# Altium PCB ArduinoShield.PcbDoc
Units mm, origin at the board's own origin, x right, y up, seen from the top; angles counter-clockwise.
Board outline 72.11 x 53.34 mm, 2 copper layers (Top Layer, Bottom Layer); 47 components, 47 nets, 124 pads, 0 vias.
Unrouted connection lines stored in the file: 2.
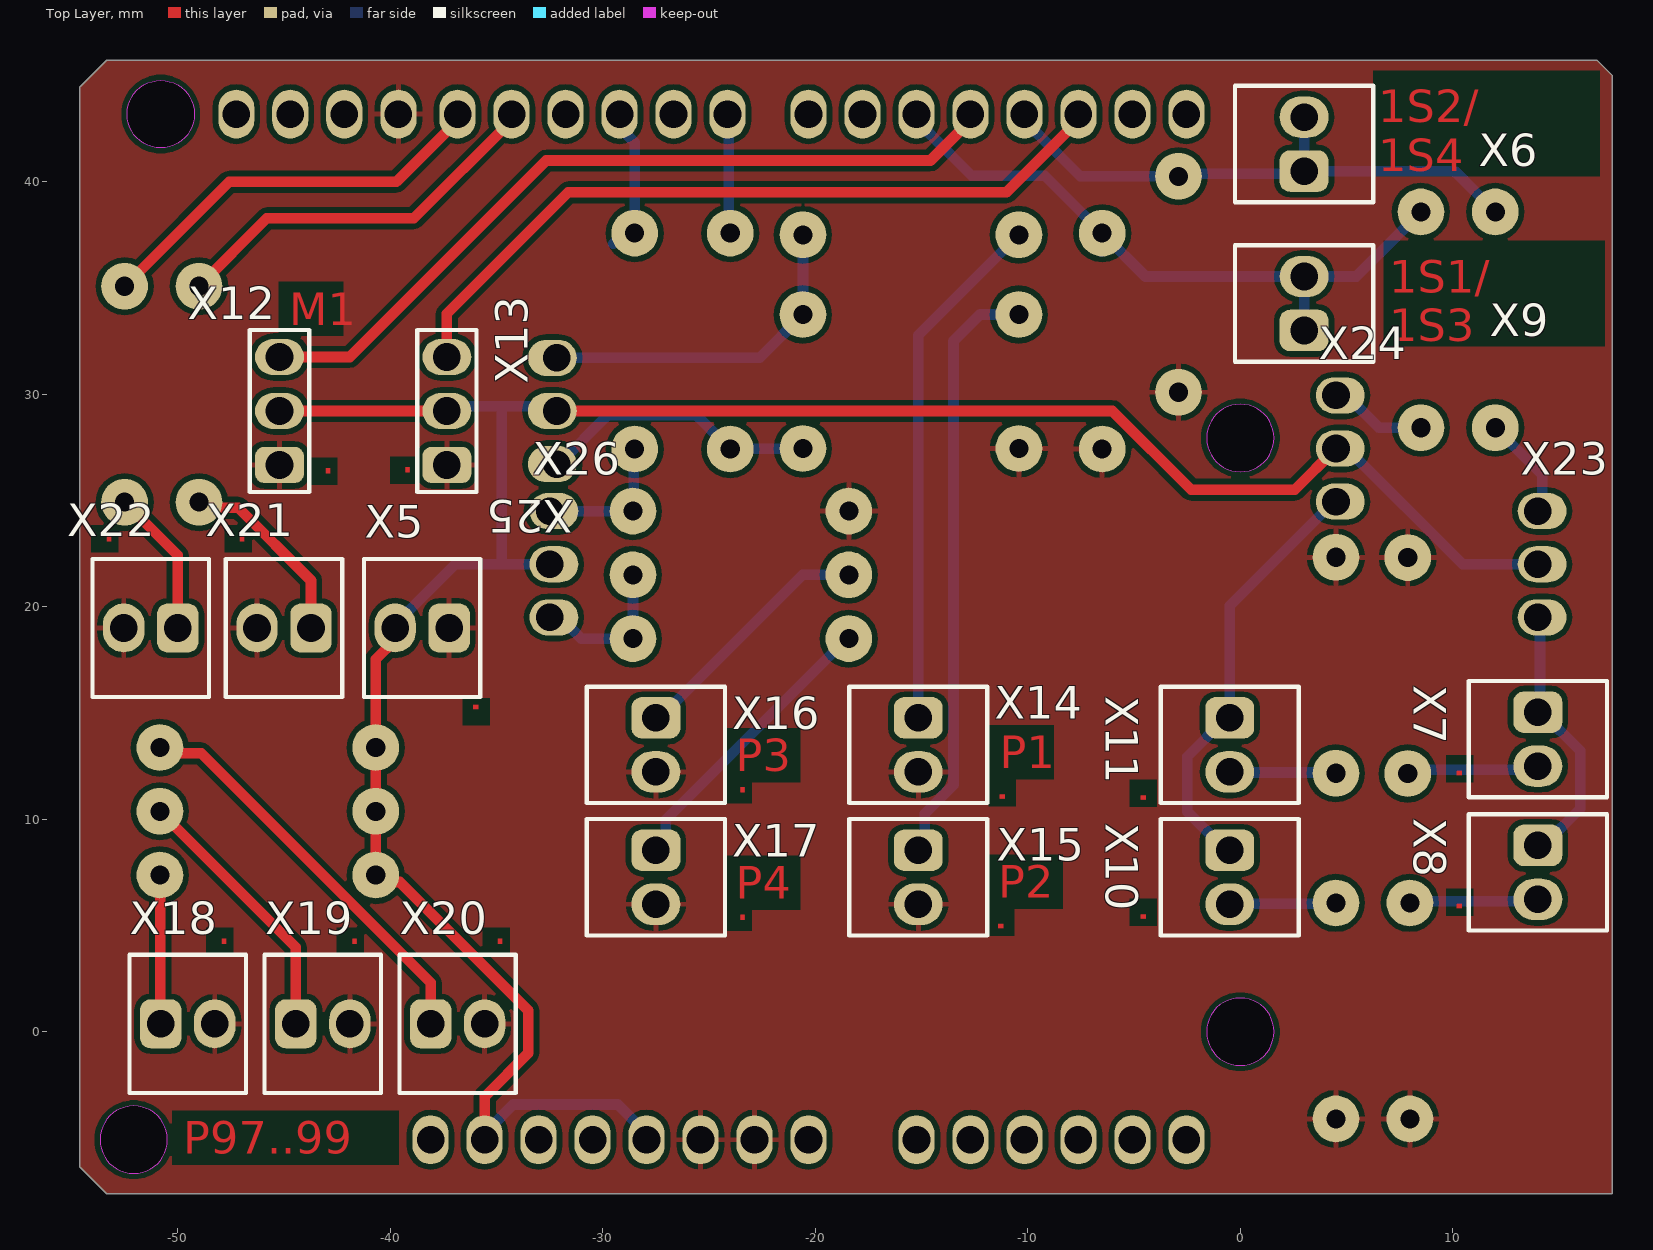
[diagram p0: Top Layer view]
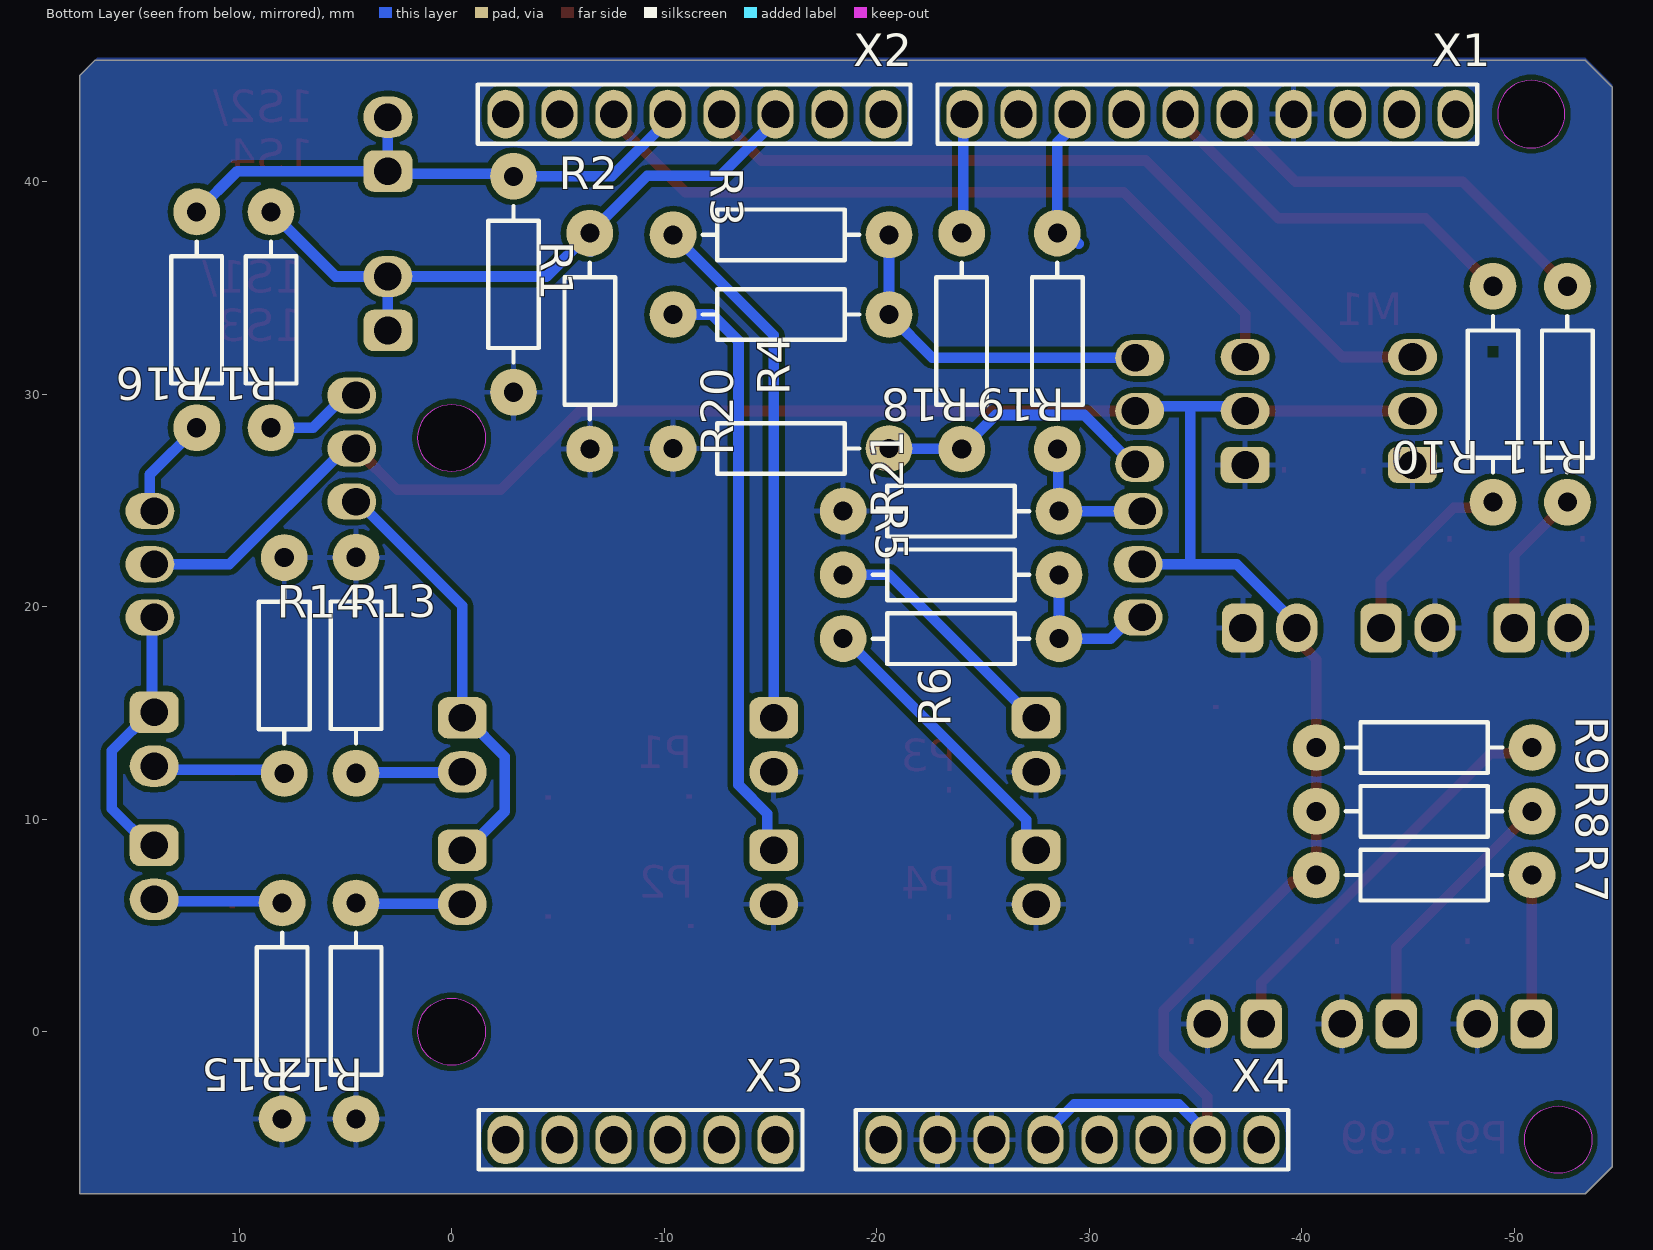
[diagram p1: Bottom Layer view, seen from below]
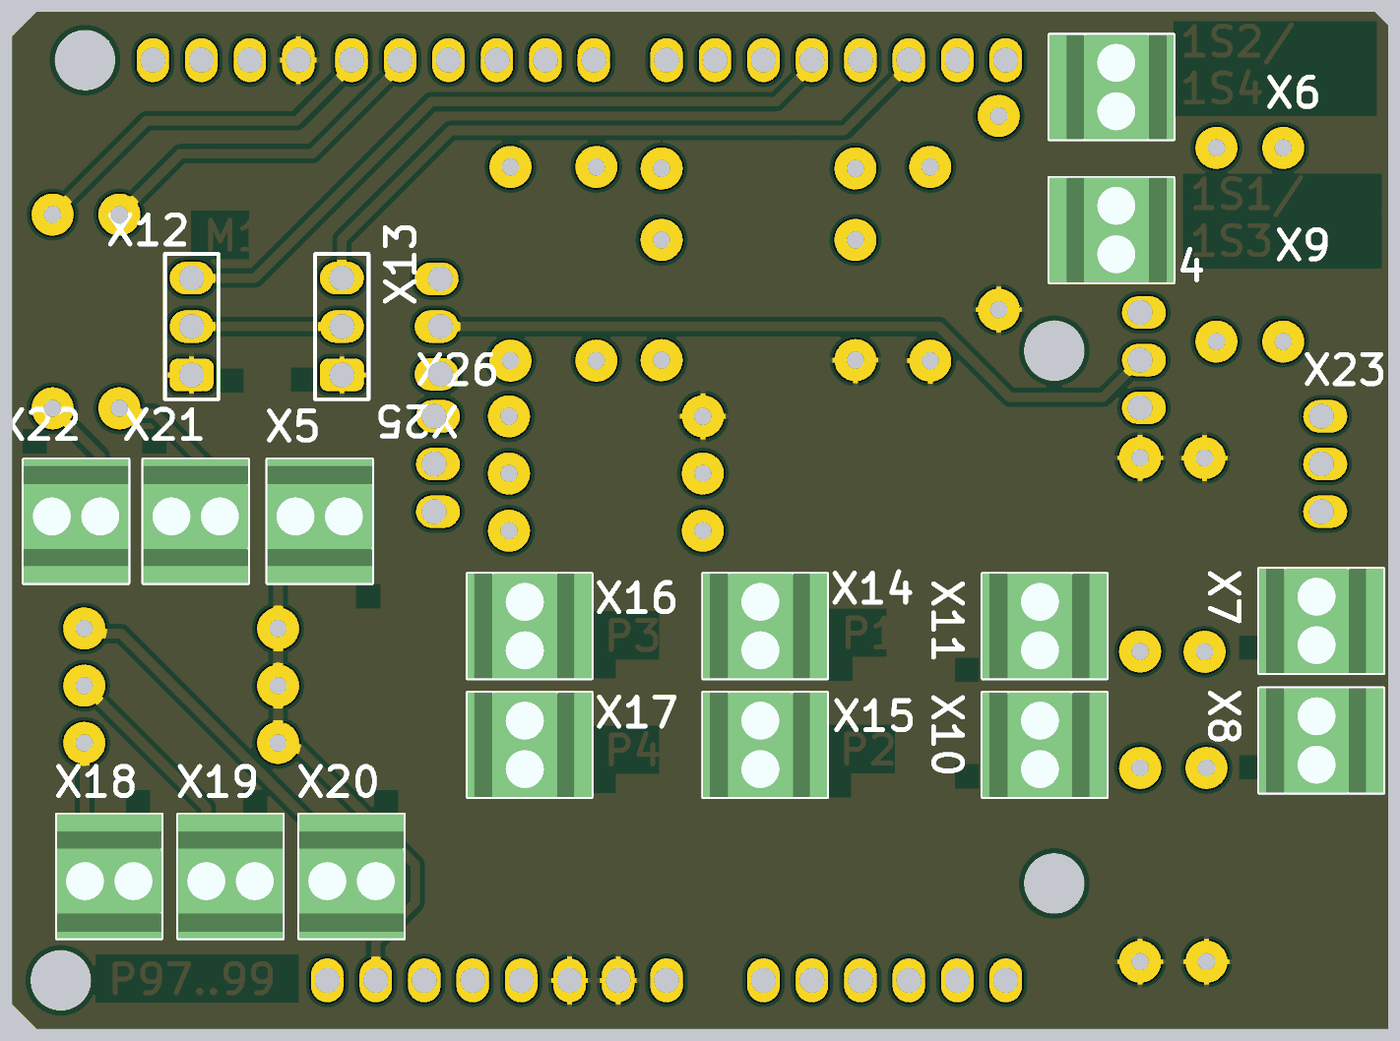
[diagram p2: 3D render of the assembled board from above, using the file's embedded part models]

## Layer stack, top to bottom
Top Solder: solder mask 0.0102, Solder Resist, Dk 3.5
Top Layer: signal copper 0.0356
Dielectric2: dielectric 0.32, FR-4, Dk 4.8
Bottom Layer: signal copper 0.0356
Bottom Solder: solder mask 0.0102, Solder Resist, Dk 3.5

## Board outline
-53.34,-7.62 17.5,-7.62 17.5,-2.5 17.5,29 17.5,45 16.78,45.72 -53.34,45.72 -54.61,44.45 -54.61,19.812 -54.61,-6.35
cut-out: -53.657,-5.08 ccw(c-52.07,-5.08) -52.07,-6.667 ccw(c-52.07,-5.08) -50.482,-5.08 ccw(c-52.07,-5.08) -52.07,-3.492 ccw(c-52.07,-5.08)
cut-out: -50.8,41.593 cw(c-50.8,43.18) -52.387,43.18 cw(c-50.8,43.18) -50.8,44.767 cw(c-50.8,43.18) -49.212,43.18 cw(c-50.8,43.18)
cut-out: -1.587,27.94 ccw(c0,27.94) 0,26.352 ccw(c0,27.94) 1.587,27.94 ccw(c0,27.94) 0,29.527 ccw(c0,27.94)
cut-out: -1.587,0 ccw(c0,0) 0,-1.587 ccw(c0,0) 1.587,0 ccw(c0,0) 0,1.587 ccw(c0,0)

## Design rules (kind name [scope] priority, off if disabled: settings)
Clearance [All] p1: gap=0.254 ignorepadtopadclearanceinfootprint=FALSE except(0: Arc-Hole Track-Hole SMDPad-Hole THPad-Hole Via-Hole Fill-Hole Poly-Hole Region-Hole Text-Hole)
DiffPairsRouting [All] p1: maxlimit=0.254 minlimit=0.254 mostfreqgap=0.254 toplayer_minwidth=0.381 toplayer_maxwidth=0.381 toplayer_prefwidth=0.381 bottomlayer_minwidth=0.381 bottomlayer_maxwidth=0.381 bottomlayer_prefwidth=0.381 substack1={5EA368DA-DBC4-4814-93F0-2F85ABCD8383} toplayer_{5ea368da-dbc4-4814-93f0-2f85abcd8383}_minwidth=0.381 toplayer_{5ea368da-dbc4-4814-93f0-2f85abcd8383}_maxwidth=0.381 toplayer_{5ea368da-dbc4-4814-93f0-2f85abcd8383}_prefwidth=0.381 bottomlayer_{5ea368da-dbc4-4814-93f0-2f85abcd8383}_minwidth=0.381 bottomlayer_{5ea368da-dbc4-4814-93f0-2f85abcd8383}_maxwidth=0.381 bottomlayer_{5ea368da-dbc4-4814-93f0-2f85abcd8383}_prefwidth=0.381 maxuncoupledlength=12.7
PolygonConnect [All] p1: connectstyle=Relief reliefconductorwidth=0.254 reliefentries=4 polygonreliefangle="90 Angle" airgapwidth=0.254
RoutingVias [All] p1: holewidth=0.711 width=1.27 viastyle="Through Hole" minholewidth=0.711 minwidth=1.27 maxholewidth=0.711 maxwidth=1.27
SolderMaskExpansion [All] p1: expansion=0.102 istentingtop=FALSE
Width [All] p1: maxlimit=0.7 minlimit=0.254 preferedwidth=0.5 substack1={5EA368DA-DBC4-4814-93F0-2F85ABCD8383} toplayer_{5ea368da-dbc4-4814-93f0-2f85abcd8383}_maxwidth=0.254 toplayer_{5ea368da-dbc4-4814-93f0-2f85abcd8383}_prefwidth=0.254 bottomlayer_{5ea368da-dbc4-4814-93f0-2f85abcd8383}_maxwidth=0.254 bottomlayer_{5ea368da-dbc4-4814-93f0-2f85abcd8383}_prefwidth=0.254 minimp=50.000000 maximp=50.000000 favimp=50.000000
29 further rules are at their usual default settings.

## Components (designator, comment, footprint, x,y, rotation, side; value= is the part's Value field where it differs from the comment)
R1 "10k" AXIAL-1/2W -2.909,35.172 r270 bottom
R2 "10k" AXIAL-1/2W -6.5,32.5 r270 bottom
R3 "100?" AXIAL-1/2W -15.5,37.5 r0 bottom
R4 "100?" AXIAL-1/2W -15.5,33.75 r0 bottom
R5 "100?" AXIAL-1/2W -23.5,21.5 r0 bottom
R6 "100?" AXIAL-1/2W -23.5,18.5 r0 bottom
R7 "100?" AXIAL-1/2W -45.76,7.373 r180 bottom
R8 "100?" AXIAL-1/2W -45.76,10.373 r180 bottom
R9 "100?" AXIAL-1/2W -45.76,13.373 r180 bottom
R10 "100?" AXIAL-1/2W -49,30 r270 bottom
R11 "100?" AXIAL-1/2W -52.5,30 r270 bottom
R12 "220R" AXIAL-1/2W 4.5,0.98 r270 bottom
R13 "220R" AXIAL-1/2W 4.5,17.245 r90 bottom
R14 "220R" AXIAL-1/2W 7.879,17.232 r90 bottom
R15 "220R" AXIAL-1/2W 7.979,0.98 r270 bottom
R16 "150R" AXIAL-1/2W 12,33.5 r270 bottom
R17 "150R" AXIAL-1/2W 8.5,33.5 r270 bottom
R18 "150R" AXIAL-1/2W -24,32.5 r270 bottom
R19 "150R" AXIAL-1/2W -28.5,32.5 r270 bottom
R20 "10k" AXIAL-1/2W -15.5,27.445 r0 bottom
R21 "10k" AXIAL-1/2W -23.5,24.5 r0 bottom
X1 "Header10x1_M" HDR10X1_M -35.56,43.18 r180 bottom locked
X2 "Header8x1_M" HDR8X1_M -11.43,43.18 r0 bottom locked
X3 "Header6x1_M" HDR6X1_M -8.89,-5.08 r0 bottom locked
X4 "Header8x1_M" HDR8X1_M -29.21,-5.08 r0 bottom locked
X5 "SCREW_2X1" 691210910002 -38.5,19 r180 top
X6 "SCREW_2X1" 691210910002 3,41.77 r90 top
X7 "SCREW_2X1" 691210910002 14,13.77 r270 top
X8 "SCREW_2X1" 691210910002 14,7.5 r270 top
X9 "SCREW_2X1" 691210910002 3,34.27 r90 top
X10 "SCREW_2X1" 691210910002 -0.5,7.27 r270 top
X11 "SCREW_2X1" 691210910002 -0.5,13.5 r270 top
X12 "Header3x1_M" HDR3X1_M -45.212,29.21 r90 top
X13 "Header3x1_M" HDR3X1_M -37.338,29.21 r90 top
X14 "SCREW_2X1" 691210910002 -15.153,13.5 r270 top
X15 "SCREW_2X1" 691210910002 -15.153,7.27 r270 top
X16 "SCREW_2X1" 691210910002 -27.5,13.5 r270 top
X17 "SCREW_2X1" 691210910002 -27.5,7.27 r270 top
X18 "SCREW_2X1" 691210910002 -49.53,0.373 r0 top
X19 "SCREW_2X1" 691210910002 -43.172,0.373 r0 top
X20 "SCREW_2X1" 691210910002 -36.83,0.373 r0 top
X21 "SCREW_2X1" 691210910002 -45,19 r180 top
X22 "SCREW_2X1" 691210910002 -51.27,19 r180 top
X23 "TO220" to220 14,22 r90 top
X24 "TO220" to220 4.5,27.445 r90 top
X25 "TO220" to220 -32.174,29.21 r270 top
X26 "TO220" to220 -32.5,22 r90 top

## Footprints (in the part's own frame and the unit in brackets; to place one, negate y for a bottom-side part, rotate by r counter-clockwise, add the part's x,y. Pads: shape width x height; smd on the part's side, far side on the other; paste and mask are expansions set on the pad)
691210910002 [mm] "2,54mm - modular - green - Horizontal wire entry - Cage clamp - 0,8mm2 wires - 02p"
  rrect50% 1.95x2.3 hole 1.3: 1(-1.27,0)
  oval 1.95x2.3 hole 1.3: 2(1.27,0)
  silkscreen extent -2.74,-3.25 2.74,3.25, body extent -2.74,-3.25 2.74,3.25, height 8.55
AXIAL-1/2W [mm] "THD, 2-Leads, Dia 2.4mm, Body Length 6mm"
  round 2.2 hole 0.9: 1(-5.08,0) 2(5.08,0)
  silkscreen extent -3.68,-1.19 3.68,1.19, body extent -5.44,-1.2 5.44,1.19, height 2.39
HDR3X1_M [mm] "Connector; Header; 3x1 Position; Straight"
  rrect50% 1.7x2.3 hole 1.3: 1(-2.54,0)
  oval 1.7x2.3 hole 1.3: 2(0,0) 3(2.54,0)
  silkscreen extent -3.81,-1.4 3.81,1.4, body extent -3.81,-1.27 3.81,1.27, height 9.27
HDR6X1_M [mm] "Connector; Header; 6x1 Position; Straight"
  oval 1.7x2.3 hole 1.3: 1(-6.35,0) 2(-3.81,0) 3(-1.27,0) 4(1.27,0) 5(3.81,0) 6(6.35,0)
  silkscreen extent -7.62,-1.4 7.62,1.4, body extent -7.61,-1.27 7.63,1.27, height 9.27
HDR8X1_M [mm] "Connector; Header; 8x1 Position; Straight"
  oval 1.7x2.3 hole 1.3: 1(-8.89,0) 2(-6.35,0) 3(-3.81,0) 4(-1.27,0) 5(1.27,0) 6(3.81,0) 7(6.35,0) 8(8.89,0)
  silkscreen extent -10.16,-1.4 10.2,1.4, body extent -10.16,-1.27 10.16,1.27, height 9.27
HDR10X1_M [mm] "Connector; Header; 10x1 Position; Straight"
  oval 1.7x2.3 hole 1.3: 1(-11.43,0) 2(-8.89,0) 3(-6.35,0) 4(-3.81,0) 5(-1.27,0) 6(1.27,0) 7(4.06,0) 8(6.604,0) 9(9.144,0) 10(11.684,0)
  silkscreen extent -12.7,-1.4 12.7,1.4, body extent -12.7,-1.27 12.7,1.27, height 9.27
to220 [mm]
  oval 1.7x2.3 hole 1.3 copper offset 0,-0.2: 1(2.5,0) 2(0,0) 3(-2.5,0)

## Part data
R1 R2 R3 R4 R5 R6 R7 R8 R9 R10 R11 R12 R13 R14 R15 R16 R17 R18 R19 R20 R21: library part RES, "Resistor", Supplier 1=CPNV
X1: library part CMP-031-000016-3, "WURTH ELEKTRONIK - 61301011121 - Pin Header, Board-to-Board, 2.54 mm, 1 Rows, 10 Contacts, Through Hole, WR-PHD Series", Color=Black, Current Rating=3A, Flammability Rating="UL94 V-0", Insulation Resistance=1GR, Manufacturer="Wurth Electronics", Manufacturer Part Number=61301011121, Max Operating Temperature=125°C, Min Operating Temperature=-40°C, Package Quantity=1000, Voltage Rating=250V, Category="Headers and Wire Housings", ComponentLink1Description=https://datasheet.ciiva.com/738/6130xx11121-738550.pdf?src-supplier=Digi-Key, ComponentLink1URL=https://datasheet.ciiva.com/738/6130xx11121-738550.pdf?src-supplier=Digi-Key, ComponentLink2Description=https://datasheet.ciiva.com/7631/1442175-7631321.pdf?src-supplier=Element14, ComponentLink2URL=https://datasheet.ciiva.com/7631/1442175-7631321.pdf?src-supplier=Element14, ComponentLink3Description=https://datasheet.ciiva.com/48700/001088187-da-01-en-wr-phd-tht-stiftleiste-61301011121-48700876.pdf?src-supplier=Conrad, ComponentLink3URL=https://datasheet.ciiva.com/48700/001088187-da-01-en-wr-phd-tht-stiftleiste-61301011121-48700876.pdf?src-supplier=Conrad, Connector Type="Male Pin", Contact Gender=Male, Contact Material="Copper Alloy,Copper", Contact Mating Length=0.236inch, Contact Plating=Gold, Contact Type="Male Pin", Design Item ID=Header10x1_M, Gender=Male, Height=11.54mm, Housing Material=PBT, Length=2.54mm, Mount="Through Hole", Number of Contacts=10, Number of Positions=10, Number of Rows=1, Orientation=Straight, Packaging=Bulk, Pitch=2.54mm, Pricing 1="1=0.89000, 10=0.87400, 50=0.73900, 100=0.67200, 1000=0.42700, 10000=0.42700 (USD)", Pricing 2="1=0.89000, 10=0.87400, 50=0.80600, 100=0.73900, 200=0.67200 (USD)", REACH SVHC=Unknown, RoHS=Yes, RoHS Compliant=Yes, Series=WR-PHD, Source=MEION_Connectors.SchLib, Stock 1=1900, Stock 2=4313, Termination=Solder, Width=25.4mm
X2 X4: library part CMP-031-000015-3, "Board-To-Board Connector, Vertical, Wr-Phd Series, Through Hole, Header, 8, 2.54 Mm", Color=Black, Manufacturer="Wurth Electronics", Manufacturer Part Number=61300811121, Category=Connectors, ComponentLink1Description=http://www.farnell.com/cad/1737268.pdf?src-supplier=Element14, ComponentLink1URL=http://www.farnell.com/cad/1737268.pdf?src-supplier=Element14, ComponentLink2Description=https://katalog.we-online.de/em/datasheet/6130xx11121.pdf?src-supplier=Digi-Key, ComponentLink2URL=https://katalog.we-online.de/em/datasheet/6130xx11121.pdf?src-supplier=Digi-Key, Connector Type="Male Pin", Contact Material=Copper, Contact Mating Length=0.236inch, Contact Plating=Gold, Design Item ID=Header8x1_M, Gender=Male, Mount="Through Hole", Number of Contacts=8, Number of Positions=8, Number of Rows=1, Packaging=Bulk, Pitch=0.1inch, Pricing 1="1=0.37000, 10=0.31500, 50=0.21900, 100=0.19900, 1000=0.18100, 10000=0.18100 (USD)", Pricing 2="1=0.37000, 10=0.31500, 25=0.26320, 50=0.21900, 100=0.19900, 1000=0.18100 (USD)", REACH SVHC=Unknown, RoHS=Yes, RoHS Compliant=Yes, Source=MEION_Connectors.SchLib, Stock 1=4202, Stock 2=10891, Termination=Solder
X3: library part CMP-031-000013-3, "WURTH ELEKTRONIK - 61300611121 - Pin Header, Board-to-Board, 2.54 mm, 1 Rows, 6 Contacts, Through Hole, WR-PHD Series", Color=Black, Current Rating=3A, Manufacturer="Wurth Electronics", Manufacturer Part Number=61300611121, Max Operating Temperature=125°C, Min Operating Temperature=-40°C, Voltage Rating=250V, Category="Headers and Wire Housings", ComponentLink1Description=http://www.mouser.com/ds/2/445/6130xx11121-538006.pdf?src-supplier=Mouser, ComponentLink1URL=http://www.mouser.com/ds/2/445/6130xx11121-538006.pdf?src-supplier=Mouser, ComponentLink2Description=https://katalog.we-online.de/em/datasheet/6130xx11121.pdf?src-supplier=Digi-Key, ComponentLink2URL=https://katalog.we-online.de/em/datasheet/6130xx11121.pdf?src-supplier=Digi-Key, ComponentLink3Description=http://www.farnell.com/cad/1737268.pdf?src-supplier=Element14, ComponentLink3URL=http://www.farnell.com/cad/1737268.pdf?src-supplier=Element14, Connector Type="Male Pin", Contact Gender=Male, Contact Material="Copper Alloy,Copper", Contact Mating Length=0.236inch, Contact Plating=Gold, Design Item ID=Header6x1_M, Gender=Male, Housing Material=PBT, Lead Free="Lead Free", Mount="Through Hole", Number of Contacts=6, Number of Positions=6, Number of Rows=1, Packaging=Bulk, Pitch=0.1inch, Pricing 1="1=0.33000, 10=0.27900, 50=0.19400, 100=0.17600, 1000=0.16000, 10000=0.16000 (USD)", Pricing 2="1=0.33000, 10=0.27900, 25=0.23200, 50=0.19400, 100=0.17600, 1000=0.16000 (USD)", REACH SVHC=Unknown, RoHS=Yes, Source=MEION_Connectors.SchLib, Stock 1=7278, Stock 2=46170, Termination="Through Hole"
X5 X6 X7 X8 X9 X10 X11 X14 X15 X16 X17 X18 X19 X20 X21 X22: library part CMP-119-000000-3, "WR-TBL Serie 2109 Horizontal Entry, Rising Cage Clamp, THT, pitch 2.54mm, 2p", Operating Temperature="-40 to +105degC", Rated Current [UL]=6A, Working Voltage [UL]=150VAC, Application="Rising Cage Clamp", Component Type=Standard, ComponentLink1Description=Manufacturer, ComponentLink1URL=http://www.we-online.de, ComponentLink2Description=Datasheet, ComponentLink2URL=https://katalog.we-online.de/em/datasheet/691210910002.pdf, Design Item ID=691210910002, Modularity=No, Mounting Technology=THT, Packaging=Box, PCB/Cable/Panel=PCB, Pin Count=2, Pin Number=2, Pitch=2.54mm, Published Date="Feburary 2021", Source="WR-TBL_Rising Cage Clamp.SchLib", Type=Horizontal
X12 X13: library part CMP-031-000005-4, "WR-PHD 2.54 mm THT Pin Header", Color=Black, Manufacturer="Wurth Electronics", Manufacturer Part Number=61300311121, Category=Connectors, ComponentLink1Description=http://www.farnell.com/cad/1737268.pdf?src-supplier=Element14, ComponentLink1URL=http://www.farnell.com/cad/1737268.pdf?src-supplier=Element14, ComponentLink2Description=https://katalog.we-online.de/em/datasheet/6130xx11121.pdf?src-supplier=Digi-Key, ComponentLink2URL=https://katalog.we-online.de/em/datasheet/6130xx11121.pdf?src-supplier=Digi-Key, Connector Type="Male Pin", Contact Material=Copper, Contact Mating Length=0.236inch, Contact Plating=Gold, Design Item ID=Header3x1_M, Gender=Male, LatestRevisionDate=17-Jul-2002, LatestRevisionNote="Re-released for DXP Platform.", Lead Free="Lead Free", Mount="Through Hole", Number of Contacts=3, Number of Positions=3, Number of Rows=1, Packaging=Bulk, Pitch=0.1inch, Price=0, Publisher="Altium Limited", REACH SVHC=Unknown, RoHS=Yes, Source=MEION_Connectors.SchLib, Stock 1=52616, Termination=Solder

## Nets (pads, with @x,y where several pads share a name; then routed paths per layer and width w, separated by ;. In a path a pad name is that pad's centre, name@x,y a point inside that pad or via, vN(x,y) a via of type N, cw(c..) or ccw(c..) an arc to the next point about the centre after c; other vN are vias at no path point)
+3V3: X4.4
+5V: R7.1 R8.1 R9.1 X4.2 X4.5 X5.2 X12.2 X13.2 X23.2 X24.2 X25.2 X26.2 | length 118.1
  Top Layer w0.5: X12.2 X13.2 ; X5.2 -39.77,18.433 -40.68,17.522 R9.1 R8.1 R7.1 -40.355,7.048 -39.548,7.048 -33.5,1 -33.5,-1 -35.56,-3.06 X4.2 ; X25.2 -6.022,29.21 -2.312,25.5 2.555,25.5 X24.2
  Bottom Layer w0.5: X5.2 -39.77,19.175 -36.945,22 -34.722,22 ; X13.2 -37.123,29.425 -34.756,29.425 ; X4.2 -35.56,-4.78 -34.206,-3.426 -29.294,-3.426 -27.94,-4.78 X4.5 ; X26.2 -34.722,22 ; X25.2 -32.389,29.425 -34.756,29.425 ; X24.2 5.014,27.445 10.459,22 X23.2 ; -34.756,29.425 -34.756,22.034 -34.722,22
AD0: X3.1
AD1: X3.2
AD2: X3.3
AD3: X3.4
AD4/SDA: X1.9 X3.5
AD5/SCL: X1.10 X3.6
AREF: X1.8
GND: R1.2 R2.2 R12.2 R13.2 R14.2 R15.2 R20.2 R21.2 X1.7 X4.6 X4.7 X5.1 X12.1 X13.1 X14.2 X15.2 X16.2 X17.2 X18.2 X19.2 X20.2 X21.2 X22.2
IO2: R2.1 R17.1 X2.3 X9.1 X9.2 | length 31.2
  Bottom Layer w0.5: X2.3 -15.24,42.88 -12.638,40.278 -9.198,40.278 R2.1 -4.46,35.54 X9.2 ; R2.1@-6.546,36.714 R2.1@-6.299,36.961 ; X9.1 X9.2 ; R17.1 5.46,35.54 X9.2
IO3: X2.4 X12.3 | length 37.4
  Top Layer w0.5: X12.3 -41.91,31.75 -32.66,41 -14.58,41 -12.7,42.88 X2.4
IO4: R1.1 R16.1 X2.5 X6.1 X6.2 | length 27
  Bottom Layer w0.5: X2.5 -10.16,42.88 -7.532,40.252 R1.1 -2.785,40.376 2.876,40.376 X6.1 ; X6.2 X6.1 ; R16.1 10.08,40.5 X6.1
IO5: X2.6 X13.3 | length 35.8
  Top Layer w0.5: X13.3 -37.338,33.782 -31.62,39.5 -11,39.5 -7.62,42.88 X2.6
IO6: X2.7
IO7: X2.8
IO8: R18.1 X1.1 | length 5.8
  Bottom Layer w0.5: R18.1@-24.203,36.791 R18.1@-24.167,36.828 ; X1.1@-24.167,43.143 X1.1 -24.065,43.115 -24.065,37.645 R18.1
IO9: X1.2
MISO/IO12: R10.1 X1.5 | length 18.5
  Top Layer w0.5: R10.1 -45.806,38.274 -38.896,38.274 -34.29,42.88 X1.5
  Bottom Layer w0.5: X1.5@-34.29,42.88 X1.5
MOSI/IO11: X1.4
NetR3_1: R3.1 R4.1 X25.3 | length 16.2
  Bottom Layer w0.5: X25.3 -22.62,31.71 R4.1 R3.1
NetR3_2: R3.2 X14.1 | length 24.7
  Bottom Layer w0.5: X14.1 -15.153,32.767 R3.2
NetR4_2: R4.2 X15.1 | length 28.3
  Top Layer w0.5: R4.2 R4.2@-10.41,33.76
  Bottom Layer w0.5: X15.1 -14.851,8.842 -14.851,10.265 -13.499,11.617 -13.499,32.501 -12.25,33.75 R4.2
NetR5_1: R5.1 R6.1 X26.3 | length 7.3
  Bottom Layer w0.5: X26.3 -32,19.5 -31,18.5 R6.1 R5.1
NetR5_2: R5.2 X16.1 | length 10.9
  Bottom Layer w0.5: X16.1 -27.325,14.77 -20.595,21.5 R5.2@-19.42,21.5
NetR6_2: R6.2 X17.1 | length 13.8
  Bottom Layer w0.5: X17.1 -27.03,9.01 -27.03,9.97 R6.2@-18.42,18.58
NetR7_2: R7.2 X18.1 | length 7
  Top Layer w0.5: R7.2 -50.82,7.353 -50.82,0.393 X18.1
NetR8_2: R8.2 X19.1 | length 12.7
  Top Layer w0.5: R8.2 -44.442,3.975 X19.1
NetR9_2: R9.2 X20.1 | length 19.3
  Top Layer w0.5: R9.2 -50.572,13.105 -48.898,13.105 -38.1,2.308 X20.1
NetR10_2: R10.2 X21.1 | length 9
  Top Layer w0.5: R10.2 -48.737,24.657 -47.15,24.657 -43.73,21.237 X21.1
NetR11_2: R11.2 X22.1 | length 7
  Top Layer w0.5: R11.2@-52.505,24.915 R11.2 -50,22.42 X22.1
NetR12_1: R12.1 X10.2 | length 5
  Bottom Layer w0.5: X10.2 -0.47,6.03 4.47,6.03 R12.1
NetR13_1: R13.1 X11.2 | length 5
  Bottom Layer w0.5: X11.2 -0.468,12.198 4.468,12.198 R13.1
NetR14_1: R14.1 X7.2 | length 6.3
  Bottom Layer w0.5: R14.1 8.054,12.326 13.826,12.326 X7.2
NetR15_1: R15.1 X8.2 | length 6.1
  Bottom Layer w0.5: R15.1 8.064,6.145 13.915,6.145 X8.2
NetR16_2: R16.2 X23.1 | length 4.9
  Bottom Layer w0.5: R16.2 14.2,26.22 14.2,24.7 X23.1
NetR17_2: R17.2 X24.1 | length 4.6
  Bottom Layer w0.5: X24.1 5,29.945 6.525,28.42 R17.2
NetR18_2: R18.2 R20.1 X25.1 | length 13.3
  Bottom Layer w0.5: X25.1 -32.074,26.71 -29.76,29.024 -25.604,29.024 R18.2 -23.987,27.433 -20.593,27.433 R20.1 ; R20.1@-20.646,27.566 -20.58,27.5 R20.1@-20.593,27.487
NetR19_2: R19.2 R21.1 X26.1 | length 6.8
  Bottom Layer w0.5: X26.1 R21.1 ; R21.1@-28.54,24.54 R19.2@-28.54,27.38
NetX7_1: X7.1 X8.1 X23.3 | length 12.7
  Bottom Layer w0.5: X8.1 14.27,8.77 16,10.5 16,13.215 14.175,15.04 X7.1 14.1,15.14 14.1,19.4 X23.3
NetX10_1: X10.1 X11.1 X24.3 | length 20.4
  Bottom Layer w0.5: X10.1 -0.675,8.54 -2.5,10.365 -2.5,12.945 -0.675,14.77 X11.1 -0.5,20.045 4.4,24.945 X24.3
RESET: X4.3
RX/IO0: X2.1
SCK/IO13: R11.1 X1.6 | length 19.5
  Top Layer w0.5: R11.1 -47.58,40 -39.71,40 -36.83,42.88 X1.6
  Bottom Layer w0.5: X1.6@-36.83,42.88 X1.6
SS/IO10: R19.1 X1.3 | length 6.1
  Bottom Layer w0.5: -29.5,37.08 R19.1@-29.355,37.225 ; X1.3 -29.21,42.555 -28.5,41.845 R19.1
TX/IO1: X2.2
VIN: X4.8
pads on no net: X4.1

## Polygon pours and split planes (outlines as drawn)
GND on Top Layer "GND_L01_P000" (solid, pour order 0): -53.34,-7.62 17.5,-7.62 17.5,-2.5 17.5,29 17.5,45 16.78,45.72 -53.34,45.72 -54.61,44.45 -54.61,19.812 -54.61,-6.35
GND on Bottom Layer "GND_L02_P001" (solid, pour order 1): -53.33,-7.63 17.5,-7.619 17.5,-2.5 17.5,29 17.5,45 16.669,45.831 -53.33,45.831 -54.6,44.561 -54.6,19.923 -54.6,-6.36

## Other copper
Top Layer:
  text "Top Layer" at 21.89,42.184 h1.52
  text "1S2/ / 1S4" at 6.5,40.5 h1.52
  text "M1" at -44.746,33.254 h1.52
  text "1S1/ / 1S3" at 7,32.5 h1.52
  text "." at -39.499,26.294 h1.52
  text "." at -43.246,26.254 h1.52
  text "." at -53.556,23.064 h1.52
  text "." at -47.286,23.064 h1.52
  text "." at -35.833,14.936 h1.52 r90
  text "." at 10.19,12.5 h1.52 r270
  text "P1" at -11.327,12.389 h1.52
  text "P3" at -23.746,12.254 h1.52
  text "." at -11.327,11.381 h1.52 r270
  text "." at -4.691,11.341 h1.52 r270
  text "." at -23.746,11.254 h1.52
  text "P2" at -11.399,6.294 h1.52
  text "P4" at -23.746,6.254 h1.52
  text "." at 10.19,6.23 h1.52 r270
  text "." at -4.691,5.746 h1.52 r270
  text "." at -11.399,5.286 h1.52 r270
  text "." at -23.746,5.254 h1.52
  text "." at -48.148,4.127 h1.52
  text "." at -42.006,4.127 h1.52
  text "." at -35.148,4.127 h1.52
  text "P97..99" at -49.746,-5.746 h1.52
Bottom Layer:
  text "Bottom Layer" at 21.89,39.115 h1.52

## Silkscreen, mask and mechanical layers (free items; w line width, h text height)
Top Overlay:
  text "Top Overlay" at 21.89,29.908 h1.52
Bottom Overlay:
  text "Bottom Overlay" at 21.763,20.002 h1.52
Top Solder:
  text "Top Solder" at 21.89,26.838 h1.52
Bottom Solder:
  text "Bottom Solder" at 21.89,23.261 h1.52